# Altium PCB chicun.PcbDoc
Units mm, origin at the board's own origin, x right, y up, seen from the top; angles counter-clockwise.
Board outline 180.09 x 118.01 mm, 2 copper layers (Top Layer, Bottom Layer); 4 components, 0 nets, 4 pads, 0 vias.
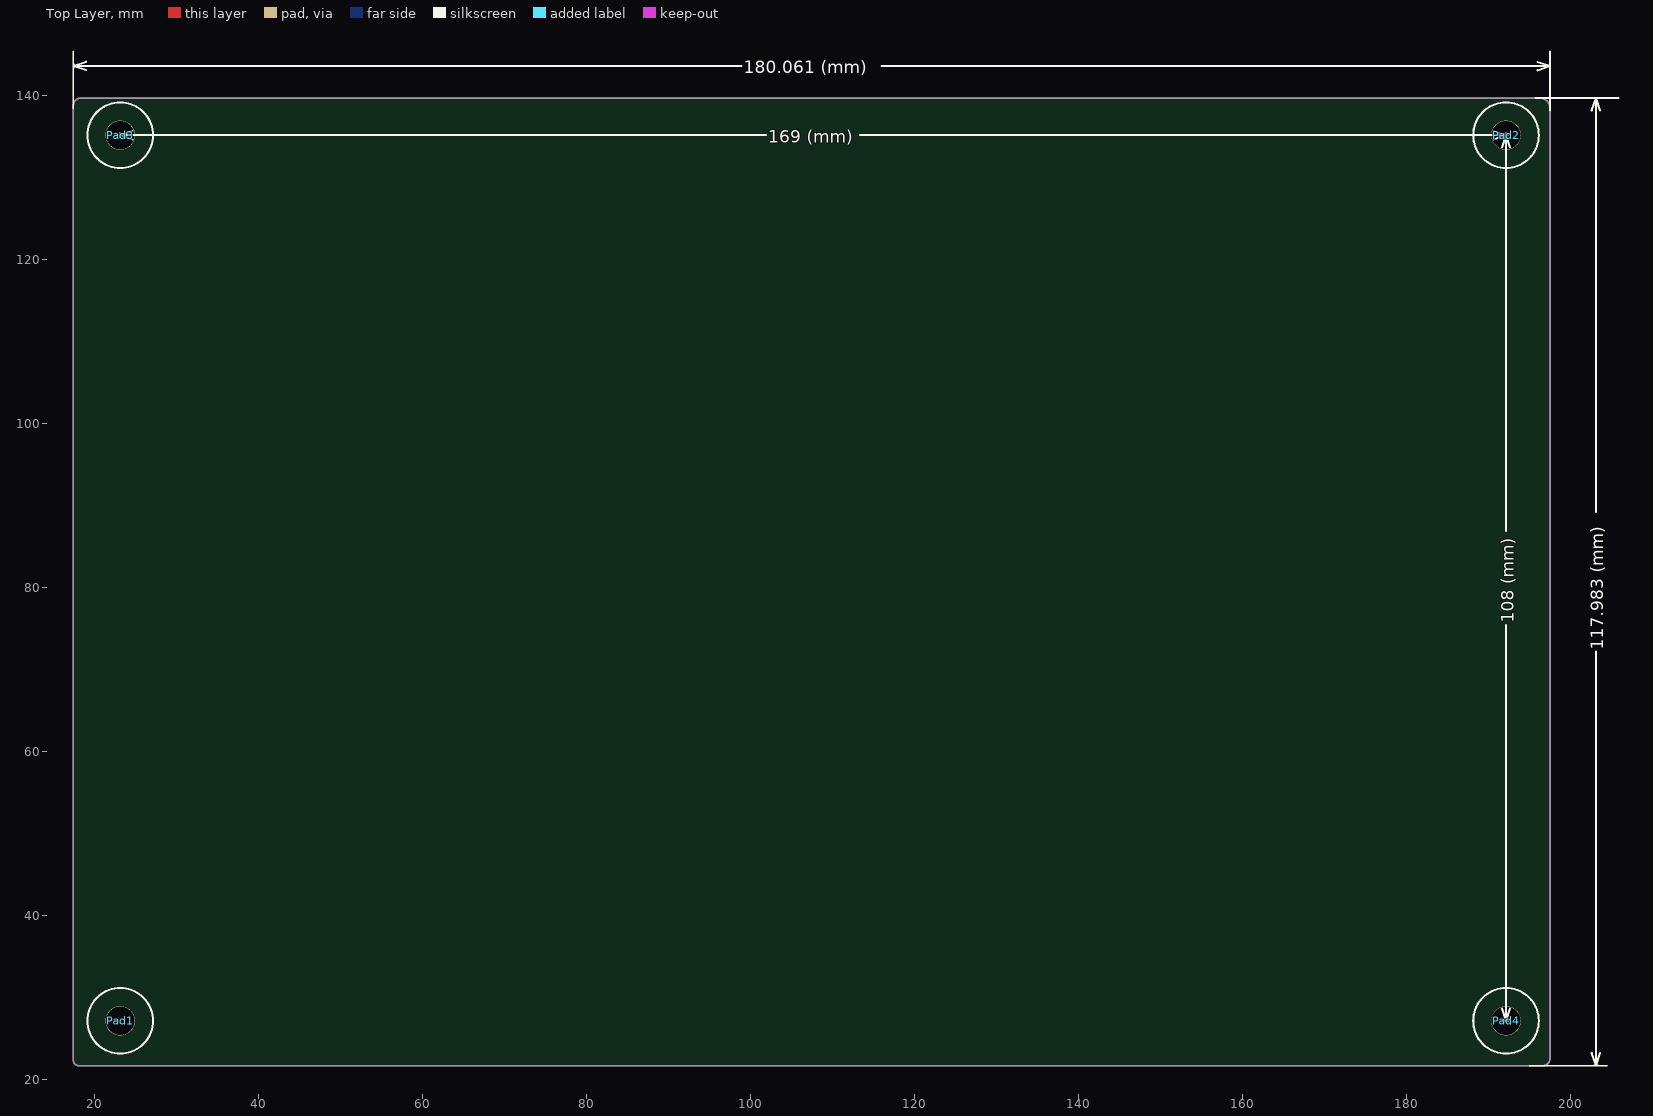
[diagram p0: Top Layer view]
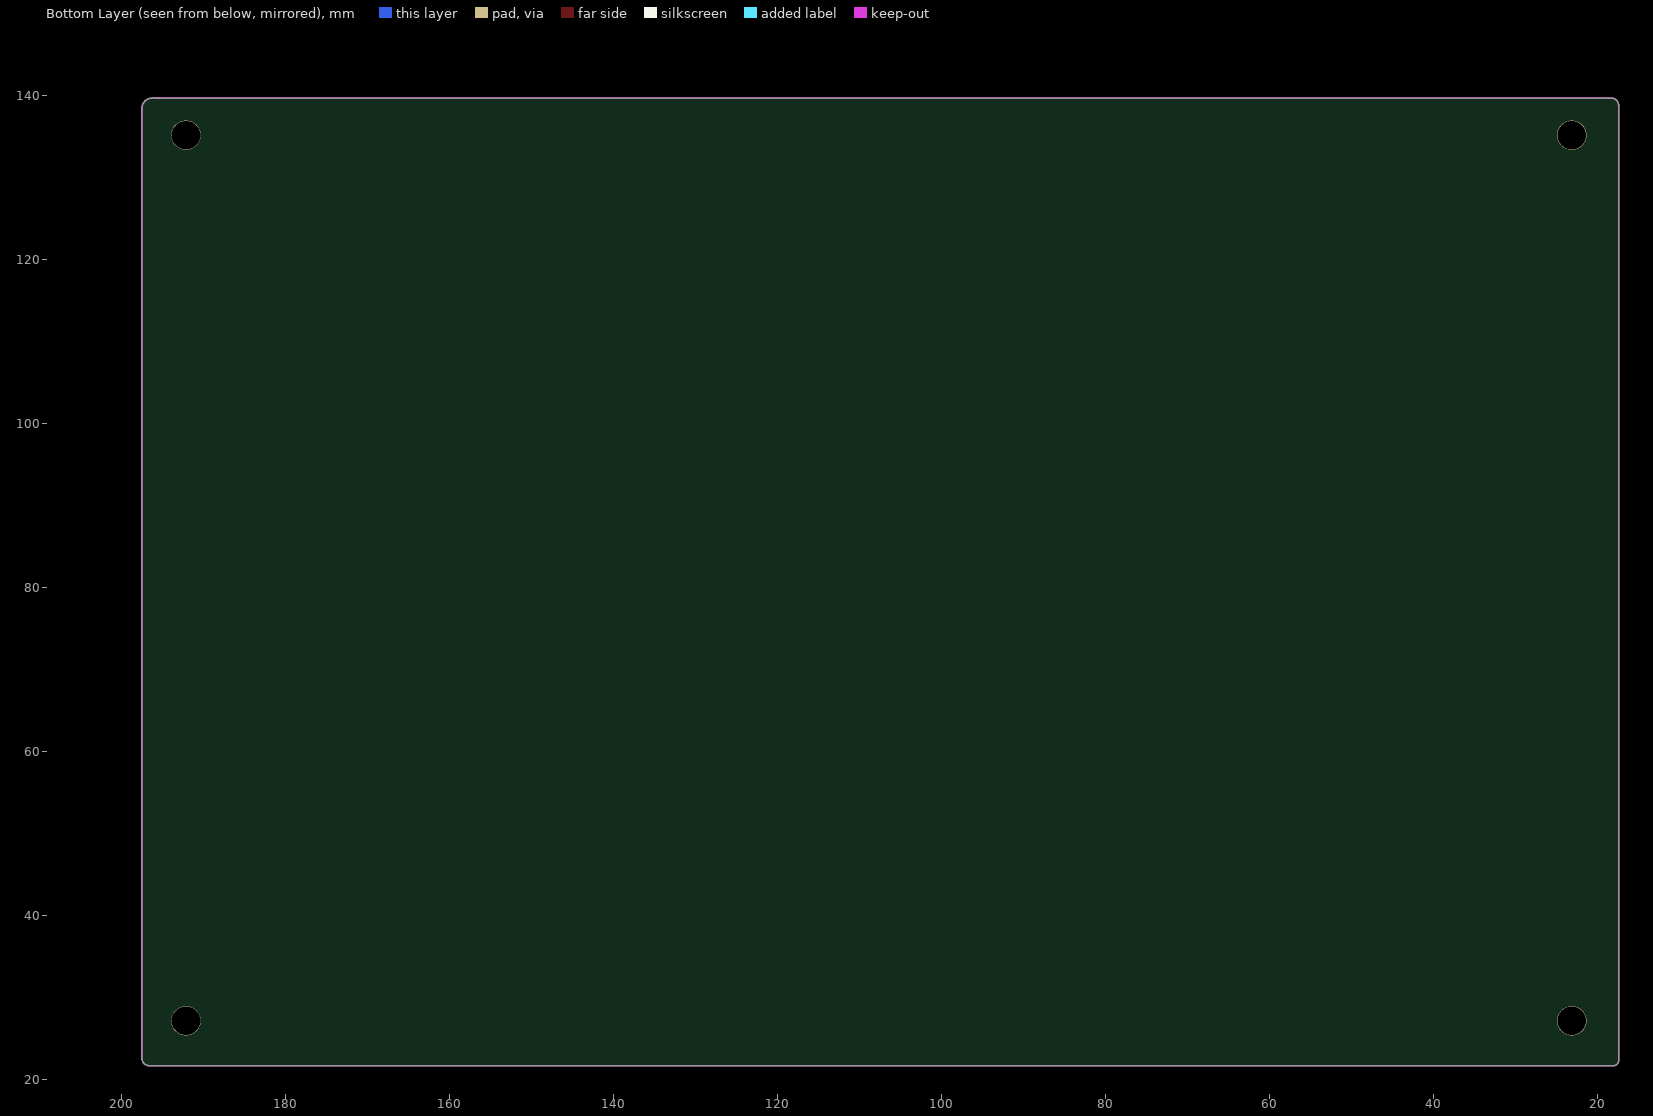
[diagram p1: Bottom Layer view, seen from below]

## Layer stack, top to bottom
Top Solder: solder mask 0.0102, Solder Resist, Dk 3.5
Top Layer: signal copper 0.0356
Dielectric 1: dielectric 0.32, FR-4, Dk 4.8
Bottom Layer: signal copper 0.0356
Bottom Solder: solder mask 0.0102, Solder Resist, Dk 3.5

## Board outline
17.399,22.352 17.399,138.811 cw(c18.305,138.811) 18.305,139.717 195.834,139.717 195.834,139.728 196.215,139.728 cw(c196.215,138.458) 197.485,138.458 197.485,22.606 cw(c196.596,22.606) 196.596,21.717 18.034,21.717 cw(c18.034,22.352)

## Design rules (kind name [scope] priority, off if disabled: settings)
Clearance [All] p1: gap=0.254
PolygonConnect [All] p1: connectstyle=Relief reliefconductorwidth=0.254 reliefentries=4 polygonreliefangle="90 Angle" airgapwidth=0.254
RoutingVias [All] p1: holewidth=0.711 width=1.27 viastyle="Through Hole" minholewidth=0.711 minwidth=1.27 maxholewidth=0.711 maxwidth=1.27
SolderMaskExpansion [All] p1: expansion=0.102
Width [All] p1: maxlimit=0.254 minlimit=0.254 preferedwidth=0.254
29 further rules are at their usual default settings.

## Components (designator, comment, footprint, x,y, rotation, side; value= is the part's Value field where it differs from the comment)
Pad1 "Pad" pad35 23.088,27.19 r0 top
Pad2 "Pad" pad35 192.088,135.19 r0 top
Pad3 "Pad" pad35 23.088,135.19 r0 top
Pad4 "Pad" pad35 192.088,27.19 r0 top

## Footprints (in the part's own frame and the unit in brackets; to place one, negate y for a bottom-side part, rotate by r counter-clockwise, add the part's x,y. Pads: shape width x height; smd on the part's side, far side on the other; paste and mask are expansions set on the pad)
pad35 [mm]
  round 3.6 hole 3.5: 1(0.025,0)
  silkscreen extent -3.97,-4 4.03,4

## Nets (pads, with @x,y where several pads share a name; then routed paths per layer and width w, separated by ;. In a path a pad name is that pad's centre, name@x,y a point inside that pad or via, vN(x,y) a via of type N, cw(c..) or ccw(c..) an arc to the next point about the centre after c; other vN are vias at no path point)
pads on no net: Pad1.1 Pad2.1 Pad3.1 Pad4.1

## Keep-outs
Keep-Out Layer:
  lines w0.2: 195.834,139.717 195.707,139.717 18.305,139.717 ccw(c18.305,138.811) 17.399,138.811 17.399,22.352 ccw(c18.034,22.352) 18.034,21.717 196.215,21.717 196.596,21.717 ccw(c196.596,22.606) 197.485,22.606 197.485,138.43 197.485,138.458 ccw(c196.215,138.458) 196.215,139.728 195.834,139.728

## Silkscreen, mask and mechanical layers (free items; w line width, h text height)
Top Overlay:
  lines w0.2: 17.399,138.43 17.399,145.415 ; 194.945,21.717 204.47,21.717 ; 195.707,139.717 205.85,139.717 ; 197.485,138.176 197.485,145.415
  lines w0.254: 17.399,143.383 17.399,143.891 ; 18.923,143.129 17.399,143.637 ; 18.923,144.145 17.399,143.637 ; 23.113,134.936 23.113,135.444 ; 24.637,134.682 23.113,135.19 ; 24.637,135.698 23.113,135.19 ; 98.898,143.627 17.399,143.637 ; 101.875,135.19 23.113,135.19 ; 113.352,135.19 192.113,135.19 ; 115.961,143.625 197.46,143.616 ; 190.589,134.682 192.113,135.19 ; 190.589,135.698 192.113,135.19 ; 191.605,28.714 192.113,27.19 ; 191.605,133.666 192.113,135.19 ; 191.859,27.19 192.367,27.19 ; 191.859,135.19 192.367,135.19 ; 192.113,75.451 192.113,27.19 ; 192.113,86.929 192.113,135.19 ; 192.113,134.936 192.113,135.444 ; 192.621,28.714 192.113,27.19 ; 192.621,133.666 192.113,135.19 ; 195.936,143.108 197.46,143.616 ; 195.936,144.124 197.46,143.616 ; 197.46,143.362 197.46,143.87 ; 202.565,23.258 203.073,21.734 ; 202.565,138.193 203.073,139.717 ; 202.819,21.734 203.327,21.734 ; 202.819,139.717 203.327,139.717 ; 203.073,72.194 203.073,21.734 ; 203.073,89.257 203.073,139.717 ; 203.581,23.258 203.073,21.734 ; 203.581,138.193 203.073,139.717
  text "180.061 (mm)" at 99.152,142.713 h1.52 r359.99
  text "169 (mm)" at 102.129,134.276 h1.52
  text "108 (mm)" at 193.028,75.705 h1.52 r90
  text "117.983 (mm)" at 203.987,72.448 h1.52 r90